# Altium PCB bridge9.PcbDoc
Units mil, origin at the board's own origin, x right, y up, seen from the top; angles counter-clockwise.
Board outline 1968.5 x 462.6 mil, 4 copper layers (Top Layer, Signal Layer 1, Signal Layer 2, Bottom Layer), stack 30.635 mil thick; 4 components, 64 nets, 12 pads, 336 vias.
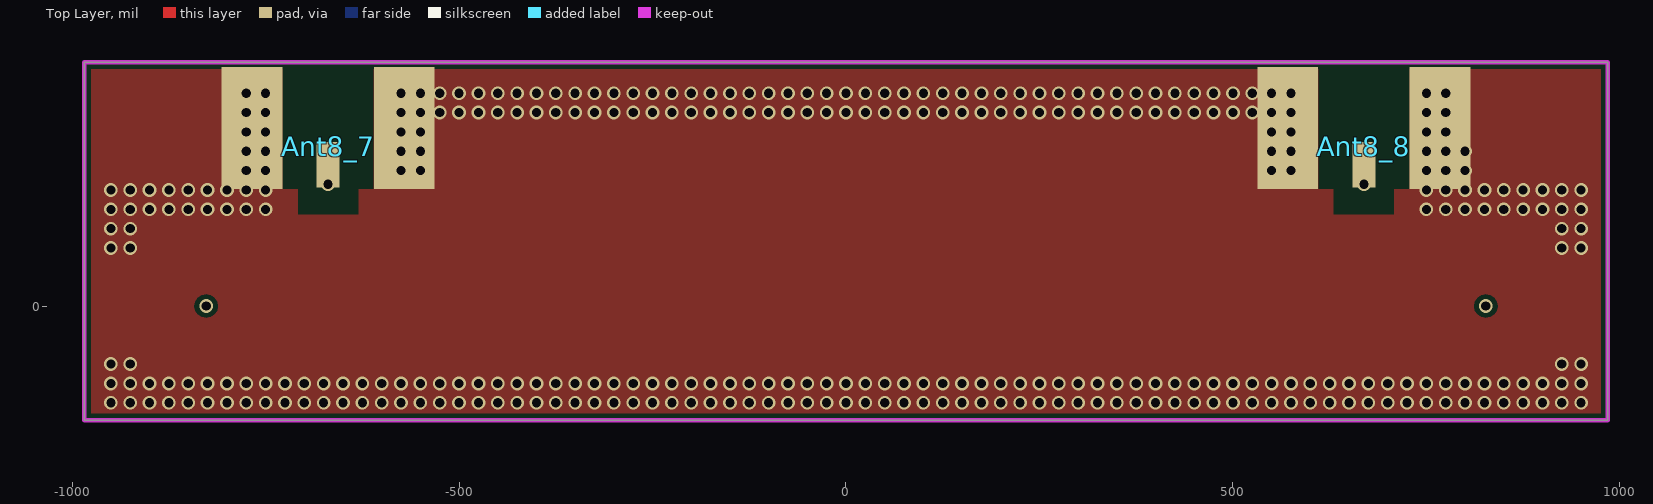
[diagram p0: Top Layer view]
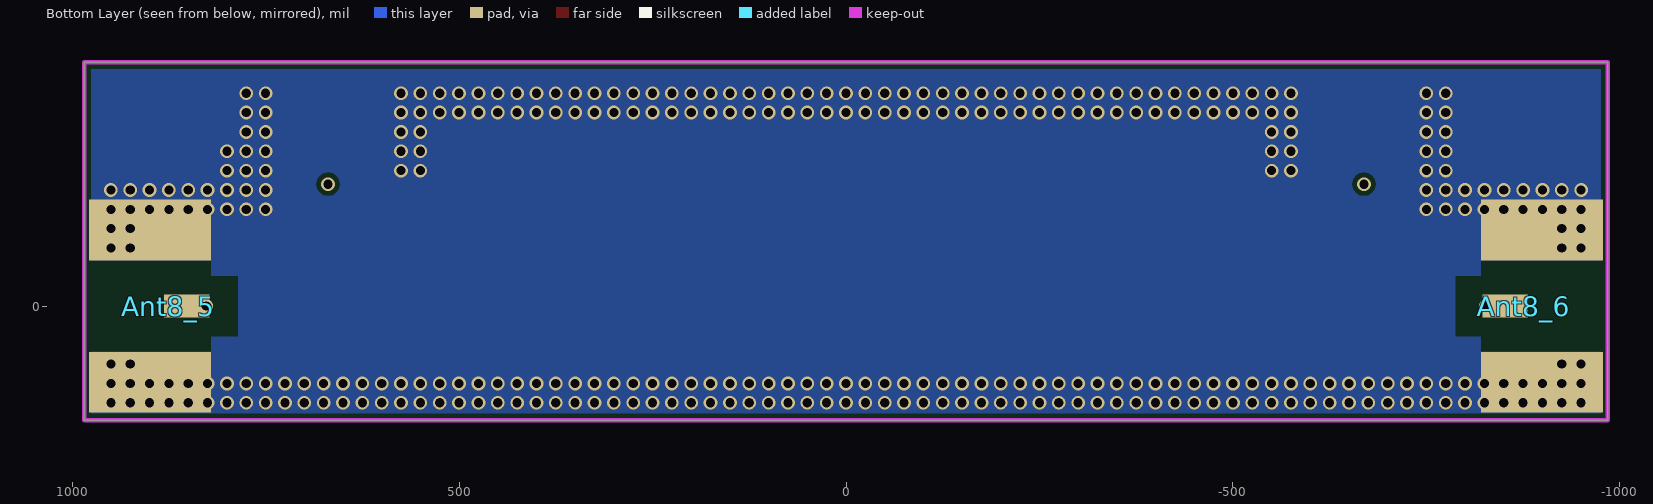
[diagram p1: Bottom Layer view, seen from below]
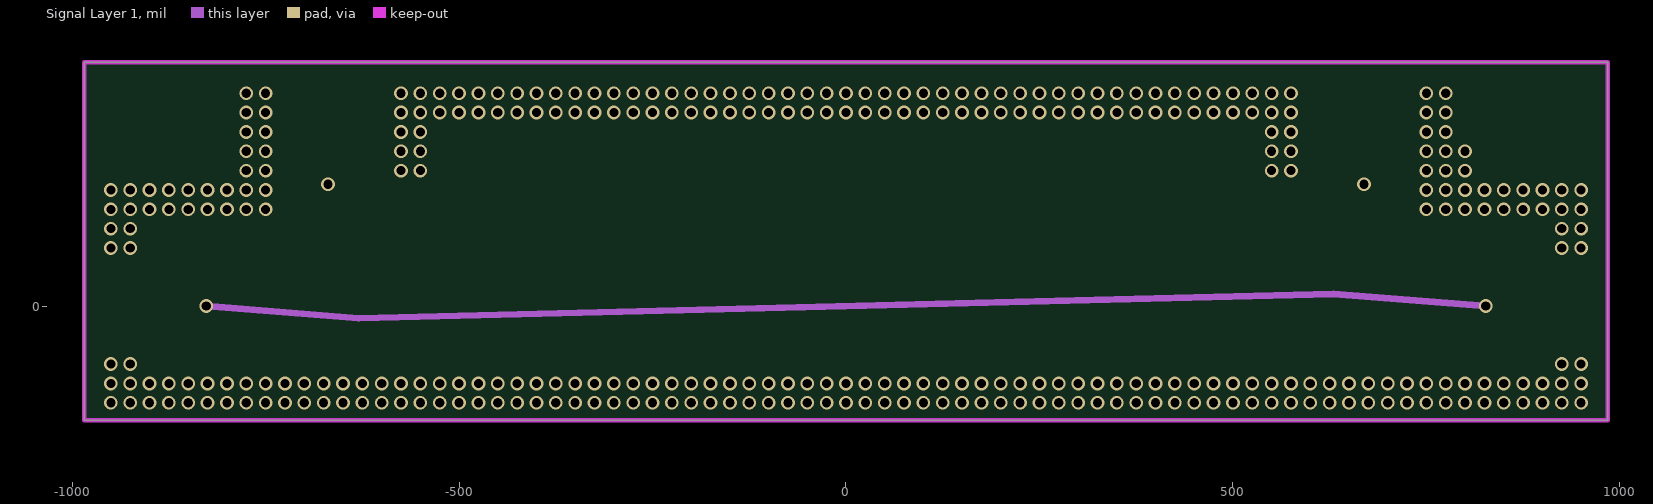
[diagram p2: Signal Layer 1]
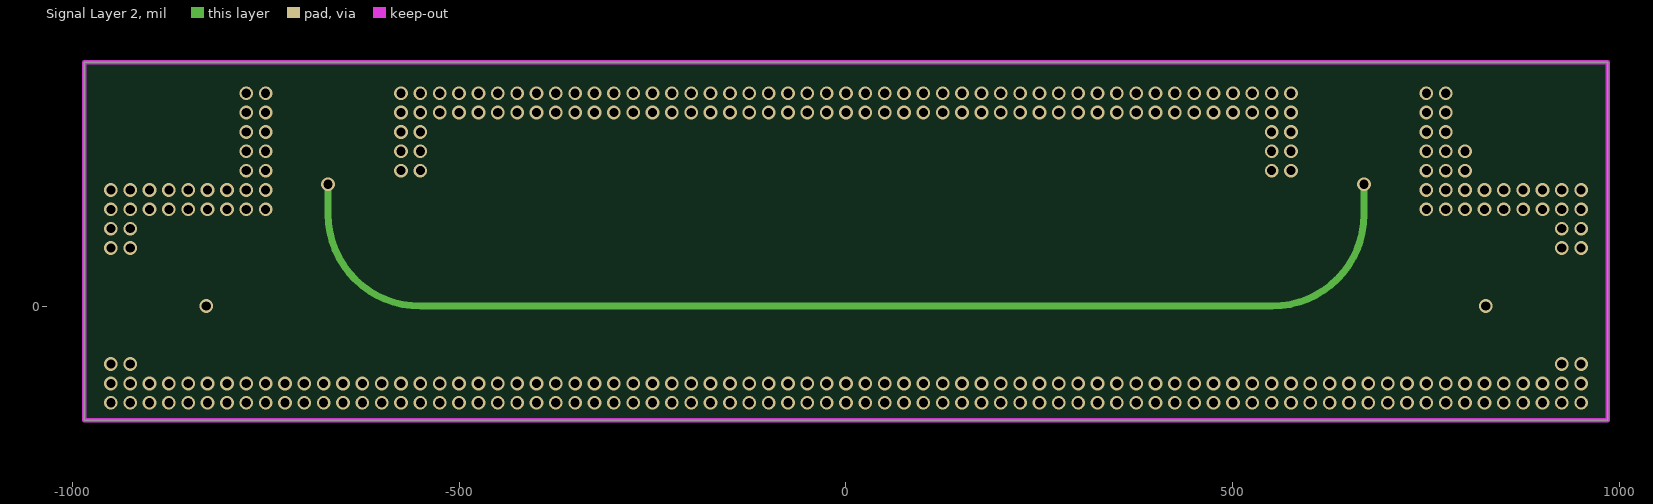
[diagram p3: Signal Layer 2]

## Layer stack, top to bottom
Top Solder: solder mask 0.4, Solder Resist, Dk 3.8
Top Layer: signal copper 1.4
Dielectric 1: core 10, Dk 4.2
Signal Layer 1: signal copper 1.4173
Dielectric 3: prepreg 5, Dk 4.2
Signal Layer 2: signal copper 1.4173
Dielectric 2: core 10, Dk 4.2
Bottom Layer: signal copper 1.4
Bottom Solder: solder mask 0.4, Solder Resist, Dk 3.8

## Board outline
-984.25,-147.64 -984.25,314.96 984.25,314.96 984.25,-147.64

## Design rules (kind name [scope] priority, off if disabled: settings)
Clearance [All] p1: gap=6 ignorepadtopadclearanceinfootprint=FALSE except(0: Arc-Hole Track-Hole SMDPad-Hole THPad-Hole Via-Hole Fill-Hole Poly-Hole Region-Hole Text-Hole)
DiffPairsRouting [All] p1: maxlimit=10 minlimit=10 mostfreqgap=10 toplayer_minwidth=5.98 toplayer_maxwidth=15 toplayer_prefwidth=15 midlayer1_minwidth=5.98 midlayer1_maxwidth=15 midlayer1_prefwidth=15 midlayer2_minwidth=15 midlayer2_maxwidth=15 midlayer2_prefwidth=15 bottomlayer_minwidth=5.98 bottomlayer_maxwidth=15 bottomlayer_prefwidth=15 maxuncoupledlength=500
MinimumSolderMaskSliver [All] p1 off: minsoldermaskwidth=10
PlaneClearance [All] p1: clearance=10
PlaneConnect [All] p1: planeconnectstyle=Direct reliefexpansion=20 reliefentries=4 reliefconductorwidth=10 reliefairgap=10
PolygonConnect [All] p1: connectstyle=Direct reliefconductorwidth=10 reliefentries=4 polygonreliefangle="90 Angle" airgapwidth=10
RoomDefinition mixer [InComponentClass('mixer')] p1 off: confinementstyle=ConfineIn formatcopy=TRUE lockcomponents=FALSE outline 1422.17,1139.62 6891.17,1139.62 6891.17,1534.62 1422.17,1534.62
RoomDefinition power [InComponentClass('power')] p2 off: confinementstyle=ConfineIn formatcopy=TRUE lockcomponents=FALSE outline 1418.17,-507.38 3763.17,-507.38 3763.17,-267.38 1418.17,-267.38
RoutingVias [All] p1: holewidth=12 width=20 viastyle="Through Hole" minholewidth=11.81 minwidth=19.68 maxholewidth=28 maxwidth=50
SilkToBoardRegionClearance [All] p1 off:
SilkToSilkClearance [All] p1 off: silktosilkclearance=10
SilkToSolderMaskClearance [IsPad] p1 off: minsilkscreentomaskgap=10 clearancetoexposedcopper=TRUE
SolderMaskExpansion [All] p1: expansion=4
Width [All] p1: maxlimit=60 minlimit=6 preferedwidth=6
23 further rules are at their usual default settings.

## Classes and differential pairs
component class mixer: R28
differential pair IF2: +IF2_P -IF2_N
differential pair IF1: +IF1_P -IF1_N

## Components (designator, comment, footprint, x,y, rotation, side; value= is the part's Value field where it differs from the comment)
Ant8_5 "Antenna" SMA-2 899.27,98.43 r270 bottom (schematic designator Ant2)
Ant8_6 "Antenna" SMA-2 -899.25,-98.43 r90 bottom (schematic designator Ant2)
Ant8_7 "Antenna" SMA-2 -570.87,229.96 r180 top (schematic designator Ant2)
Ant8_8 "Antenna" SMA-2 767.72,229.96 r180 top (schematic designator Ant2)

## Footprints (in the part's own frame and the unit in brackets; to place one, negate y for a bottom-side part, rotate by r counter-clockwise, add the part's x,y. Pads: shape width x height; smd on the part's side, far side on the other; paste and mask are expansions set on the pad)
SMA-2 [mm]
  rect 0.75x1.5 smd: 1(2.5,1.2)
  rect 2x4 smd: GND(0,0) GND(5,0)
  Top Layer pour cut-out: 1,2 4,2 4,-2 1,-2

## Via types
v1: diameter 17.72, hole 11.81, Top Layer to Bottom Layer, tented both sides, 336 vias

## Nets (pads, with @x,y where several pads share a name; then routed paths per layer and width w, separated by ;. In a path a pad name is that pad's centre, name@x,y a point inside that pad or via, vN(x,y) a via of type N, cw(c..) or ccw(c..) an arc to the next point about the centre after c; other vN are vias at no path point)
5V: 
5V-MIXER: 
5VA: Ant8_5.1 Ant8_6.1 | length 1654.8
  Signal Layer 1 w9: v1@-826.58,0 -629.92,-15.75 629.92,15.75 v1@826.58,0
  other v1: -826.77,0 826.77,0
5VB: Ant8_7.1 Ant8_8.1 | length 1550.7
  Signal Layer 2 w9: v1(-669.29,157.48) -669.29,118.11 ccw(c-550.59,118.7) -550,0 550,0 ; 551.18,0 ccw(c551.18,118.11) 669.29,118.11 v1(669.29,157.48)
6V: 
-3.3V: 
DETO: 
GND: Ant8_5.GND Ant8_6.GND Ant8_7.GND Ant8_8.GND
  other v1: -950,-125 -925,-125 -900,-125 -875,-125 -850,-125 -825,-125 -800,-125 -775,-125 -750,-125 -725,-125 -700,-125 -675,-125 -650,-125 -625,-125 -600,-125 -575,-125 -550,-125 -525,-125 -500,-125 -475,-125 -450,-125 -425,-125 -400,-125 -375,-125 -350,-125 -325,-125 -300,-125 -275,-125 -250,-125 -225,-125 -200,-125 -175,-125 -150,-125 -125,-125 -100,-125 -75,-125 -50,-125 -25,-125 0,-125 25,-125 50,-125 75,-125 100,-125 125,-125 150,-125 175,-125 200,-125 225,-125 250,-125 275,-125 300,-125 325,-125 350,-125 375,-125 400,-125 425,-125 450,-125 475,-125 500,-125 525,-125 550,-125 575,-125 600,-125 625,-125 650,-125 675,-125 700,-125 725,-125 750,-125 775,-125 800,-125 825,-125 850,-125 875,-125 900,-125 925,-125 950,-125 -950,-100 -925,-100 -900,-100 -875,-100 -850,-100 -825,-100 -800,-100 -775,-100 -750,-100 -725,-100 -700,-100 -675,-100 -650,-100 -625,-100 -600,-100 -575,-100 -550,-100 -525,-100 -500,-100 -475,-100 -450,-100 -425,-100 -400,-100 -375,-100 -350,-100 -325,-100 -300,-100 -275,-100 -250,-100 -225,-100 -200,-100 -175,-100 -150,-100 -125,-100 -100,-100 -75,-100 -50,-100 -25,-100 0,-100 25,-100 50,-100 75,-100 100,-100 125,-100 150,-100 175,-100 200,-100 225,-100 250,-100 275,-100 300,-100 325,-100 350,-100 375,-100 400,-100 425,-100 450,-100 475,-100 500,-100 525,-100 550,-100 575,-100 600,-100 625,-100 650,-100 675,-100 700,-100 725,-100 750,-100 775,-100 800,-100 825,-100 850,-100 875,-100 900,-100 925,-100 950,-100 -950,-75 -925,-75 925,-75 950,-75 -950,75 -925,75 925,75 950,75 -950,100 -925,100 925,100 950,100 -950,125 -925,125 -900,125 -875,125 -850,125 -825,125 -800,125 -775,125 -750,125 750,125 775,125 800,125 825,125 850,125 875,125 900,125 925,125 950,125 -950,150 -925,150 -900,150 -875,150 -850,150 -825,150 -800,150 -775,150 -750,150 750,150 775,150 800,150 825,150 850,150 875,150 900,150 925,150 950,150 -775,175 -750,175 -575,175 -550,175 550,175 575,175 750,175 775,175 800,175 -775,200 -750,200 -575,200 -550,200 550,200 575,200 750,200 750,200 775,200 775,200 800,200 -775,225 -750,225 -575,225 -550,225 550,225 575,225 750,225 775,225 -775,250 -750,250 -575,250 -550,250 -525,250 -500,250 -475,250 -450,250 -425,250 -400,250 -375,250 -350,250 -325,250 -300,250 -275,250 -250,250 -225,250 -200,250 -175,250 -150,250 -125,250 -100,250 -75,250 -50,250 -25,250 0,250 25,250 50,250 75,250 100,250 125,250 150,250 175,250 200,250 225,250 250,250 275,250 300,250 325,250 350,250 375,250 400,250 425,250 450,250 475,250 500,250 525,250 550,250 575,250 750,250 775,250 -775,275 -750,275 -575,275 -550,275 -525,275 -500,275 -475,275 -450,275 -425,275 -400,275 -375,275 -350,275 -325,275 -300,275 -275,275 -250,275 -225,275 -200,275 -175,275 -150,275 -125,275 -100,275 -75,275 -50,275 -25,275 0,275 25,275 50,275 75,275 100,275 125,275 150,275 175,275 200,275 225,275 250,275 275,275 300,275 325,275 350,275 375,275 400,275 425,275 450,275 475,275 500,275 525,275 550,275 575,275 750,275 775,275
IF1_N: 
IF1_P: 
IF2_N: 
IF2_P: 
IF3+: 
IF3-: 
NetAnt1_1: 
NetAnt2_1: 
NetC1_1: 
NetC1_2: 
NetC2_1: 
NetC4_1: 
NetC7_2: 
NetC11_2: 
NetC15_2: 
NetC18_2: 
NetC24_2: 
NetC28_1: 
NetC28_2: 
NetC29_1: 
NetC30_1: 
NetC30_2: 
NetC31_1: 
NetC31_2: 
NetC43_2: 
NetC44_1: 
NetC44_2: 
NetC45_2: 
NetC46_1: 
NetC46_2: 
NetC47_2: 
NetC48_2: 
NetC49_1: 
NetC49_2: 
NetC50_1: 
NetC50_2: 
NetC51_2: 
NetC53_2: 
NetC57_1: 
NetC57_2: 
NetC58_1: 
NetC58_2: 
NetC59_1: 
NetC59_2: 
NetC60_1: 
NetC60_2: 
NetC64_2: 
NetC66_2: 
NetR2_1: 
NetR4_1: 
NetR5_1: 
NetR10_1: 
NetR15_1: 
NetR24_1: 
VSET: 
VSYS: 

## Polygon pours and split planes (outlines as drawn)
GND on Bottom Layer "GND_L04_P000" (solid, remove dead copper, pour order 0): -984.25,-147.64 -984.25,314.96 984.25,314.96 984.25,-147.64
GND on Top Layer "GND_L01_P002" (solid, remove dead copper, pour order 2): -984.25,314.96 984.25,314.96 984.25,-147.64 -984.25,-147.64

## Keep-outs
Keep-Out Layer:
  the board outline again, w6

## Other copper
Top Layer:
  pour cut-out: -629.92,177.17 -629.92,118.11 -708.66,118.11 -708.66,177.17
  pour cut-out: 708.66,177.17 708.66,118.11 629.92,118.11 629.92,177.17
Bottom Layer:
  pour cut-out: -846.46,39.37 -787.4,39.37 -787.4,-39.37 -846.46,-39.37
  pour cut-out: 844.69,-39.37 785.63,-39.37 785.63,39.37 844.69,39.37

## Silkscreen, mask and mechanical layers (free items; w line width, h text height)
Top Solder:
  rectangle: -984.25,-147.64 -825,150
  rectangle: 825,-147.64 984.25,150
Bottom Solder:
  rectangle: -825,150 -525,314.96
  rectangle: 525,150 825,314.96